# EAGLE board Copy of Smart Helmet ver2 (EAGLE 7.6.0)

Size 73.58 x 63.39 mm. Coordinates in mm from the lower left corner, seen from the top.
Outline: 0,0 56.82,0 56.82,53.33 0,53.33 0,0
Copper layers (1*16): Top 0.035mm / dielectric 1.5mm / Bottom 0.035mm
Design rules "default": minimum track width 10mil, minimum drill 24mil, track to track 8mil, track to pad 8mil, pad to pad 8mil, via to via 8mil, smd to smd 8mil, copper to edge 40mil, drill to drill 8mil, minimum pad ring 10mil, minimum via ring 8mil, stop-mask expansion 4mil, vias tented up to drill 0mil, thermal gap 10mil

## Footprints (pad centres in the part's own frame; a part is rotated, then mirrored left to right if it is on the bottom)
LED5MM = drill 0.813 octagon: A -1.27,0; K 1.27,0
SNR6-D19.0MM = drill 1.3 pad 2: 1 -3.355,3.355; 2 -3.355,-3.355; 3 3.355,3.355; 4 3.355,-3.355; 5 0,4.75; 6 0,-4.75
PIEZO-22MM = drill 1 pad 2.54: P$1 -5,0; P$2 5,0
0207/10 = drill 0.813 octagon: 1 -5.08,0; 2 5.08,0
PHOTORESISTOR-2.54 = drill 1 pad 1.5: P$1 -1.27,0; P$2 1.27,0
B25V = drill 0.813 long: A 2.54,0.635; E -2.54,0.635; S 0,0.635
ARDUINO_UNO = drill 1.016 pad 1.88: 0 63.5,50.8; 1 60.96,50.8; 2 58.42,50.8; 3 55.88,50.8; 3.3V 35.56,2.54; 4 53.34,50.8; 5 50.8,50.8; 5V 38.1,2.54; 6 48.26,50.8; 7 45.72,50.8; 8 41.656,50.8; 9 39.116,50.8; 10 36.576,50.8; 11 34.036,50.8; 12 31.496,50.8; 13 28.956,50.8; A0 50.8,2.54; A1 53.34,2.54; A2 55.88,2.54; A3 58.42,2.54; A4 60.96,2.54; A5 63.5,2.54; AREF 23.876,50.8; GND 26.416,50.8; GND. 43.18,2.54; GND.. 40.64,2.54; I/OREF 30.48,2.54; N/C 27.94,2.54; RESET 33.02,2.54; SCL 18.796,50.8; SDA 21.336,50.8; VIN 45.72,2.54 | hole 3.2: 66.04,7.62; 66.04,35.56; 15.24,50.8; 13.97,2.54
1X16P-2.54-2.54-11.6-3.0-BLACK-MALE = drill 0.889 pad 1.651 square: 1 0,19.05 | drill 0.889 pad 1.651: 2 0,16.51; 3 0,13.97; 4 0,11.43; 5 0,8.89; 6 0,6.35; 7 0,3.81; 8 0,1.27; 9 0,-1.27; 10 0,-3.81; 11 0,-6.35; 12 0,-8.89; 13 0,-11.43; 14 0,-13.97; 15 0,-16.51; 16 0,-19.05
2X4P-2.54-65/35MIL = drill 0.889 pad 1.651 square: 1 -1.27,3.81 | drill 0.889 pad 1.651: 2 -1.27,1.27; 3 -1.27,-1.27; 4 -1.27,-3.81; 5 1.27,-3.81; 6 1.27,-1.27; 7 1.27,1.27; 8 1.27,3.81
TO92 = drill 0.813 octagon: 1 1.27,0; 2 0,1.905; 3 -1.27,0
2X02 = drill 1.016 octagon: 1 -1.27,-1.27; 2 -1.27,1.27; 3 1.27,-1.27; 4 1.27,1.27

## Placement (x,y rotation side)
D1  [LED5MM]  5,225.98 0 top  (outside the outline)
D2  [LED5MM]  5,238.68 0 top  (outside the outline)
GAS2  [SNR6-D19.0MM]  5,60.88 0 top
PIEZO1  [PIEZO-22MM]  5,137.08 0 top  (outside the outline)
R1  220‎Ω  [0207/10]  5,48.18 0 top
R2  20k‎Ω  [0207/10]  5,73.58 0 top  (outside the outline)
R3  [PHOTORESISTOR-2.54]  5,175.18 0 top  (outside the outline)
R4  1k‎Ω  [0207/10]  5,98.98 0 top  (outside the outline)
R5  1k‎Ω  [0207/10]  5,187.88 0 top  (outside the outline)
R6  220‎Ω  [0207/10]  5,111.68 0 top  (outside the outline)
R7  220‎Ω  [0207/10]  5,124.38 0 top  (outside the outline)
R8  1k‎Ω  [0207/10]  5,200.58 0 top  (outside the outline)
R9  1k‎Ω  [0207/10]  5,213.28 0 top  (outside the outline)
R10  1k‎Ω  [0207/10]  5,251.38 0 top  (outside the outline)
R11  1k‎Ω  [0207/10]  5,264.08 0 top  (outside the outline)
Rpot2  250k‎Ω  [B25V]  5,35.48 0 top
U1  [ARDUINO_UNO]  5,10.08 0 top
U2  [1X16P-2.54-2.54-11.6-3.0-BLACK-MALE]  5,22.78 0 top
U3  [2X4P-2.54-65/35MIL]  5,86.28 0 top  (outside the outline)
U4  [TO92]  5,149.78 0 top  (outside the outline)
U5  [2X02]  5,162.48 0 top  (outside the outline)

## Library data of the parts
D1 D2 GAS2 PIEZO1 R1-R11 Rpot2 U1-U5 = AUTODESK_CIRCUITS_BREADBOARD

## Nets
N$1: Rpot2.S U2.3
N$2: U1.13 U2.4
N$3: U1.12 U2.6
N$4: U1.6 U2.11
N$5: U1.5 U2.12
N$6: U1.4 U2.13
N$7: U1.3 U2.14
N$8: GAS2.2 R2.2
N$9: GAS2.4 U1.A0
N$10: R6.1 U1.9
N$11: U1.8 U3.5
N$12: R7.2 U1.GND.
N$13: R4.2 U1.3.3V U3.8
N$14: R4.1 U3.6
N$15: U1.GND U3.4
N$16: R6.2 R7.1 U3.1
N$17: R3.P$1 R8.2 U1.A2
N$18: R9.2 U1.7 U5.3
N$19: U1.A1 U4.2
N$20: PIEZO1.P$1 R5.2
N$21: D1.K D2.K GAS2.6 PIEZO1.P$2 R2.1 R3.P$2 Rpot2.E U1.GND.. U2.1 U2.5 U2.16 U4.1 U5.1
N$22: R1.2 U2.15
N$23: D2.A R10.2
N$24: D1.A R11.2
N$25: R11.1 U1.2
N$26: R10.1 U1.11
N$27: GAS2.1 GAS2.3 GAS2.5 R1.1 R8.1 R9.1 Rpot2.A U1.5V U2.2 U4.3
N$28: R5.1 U1.A4

## Tracks (layer width: path | path; a pad name or v marks a point on that pad's centre or on a via)
N$1  (1 unrouted)
N$2  (1 unrouted)
N$3  (1 unrouted)
N$4  (1 unrouted)
N$5  (1 unrouted)
N$6  (1 unrouted)
N$7  (1 unrouted)
N$8  (1 unrouted)
N$9  (1 unrouted)
N$10  (1 unrouted)
N$11  (1 unrouted)
N$12  (1 unrouted)
N$13  (2 unrouted)
N$14  (1 unrouted)
N$15  (1 unrouted)
N$16  (2 unrouted)
N$17  (2 unrouted)
N$18  (2 unrouted)
N$19  (1 unrouted)
N$20  (1 unrouted)
N$21  (12 unrouted)
N$22  (1 unrouted)
N$23  (1 unrouted)
N$24  (1 unrouted)
N$25  (1 unrouted)
N$26  (1 unrouted)
N$27  (9 unrouted)
N$28  (1 unrouted)